# Allegro board ETHERZb.brd
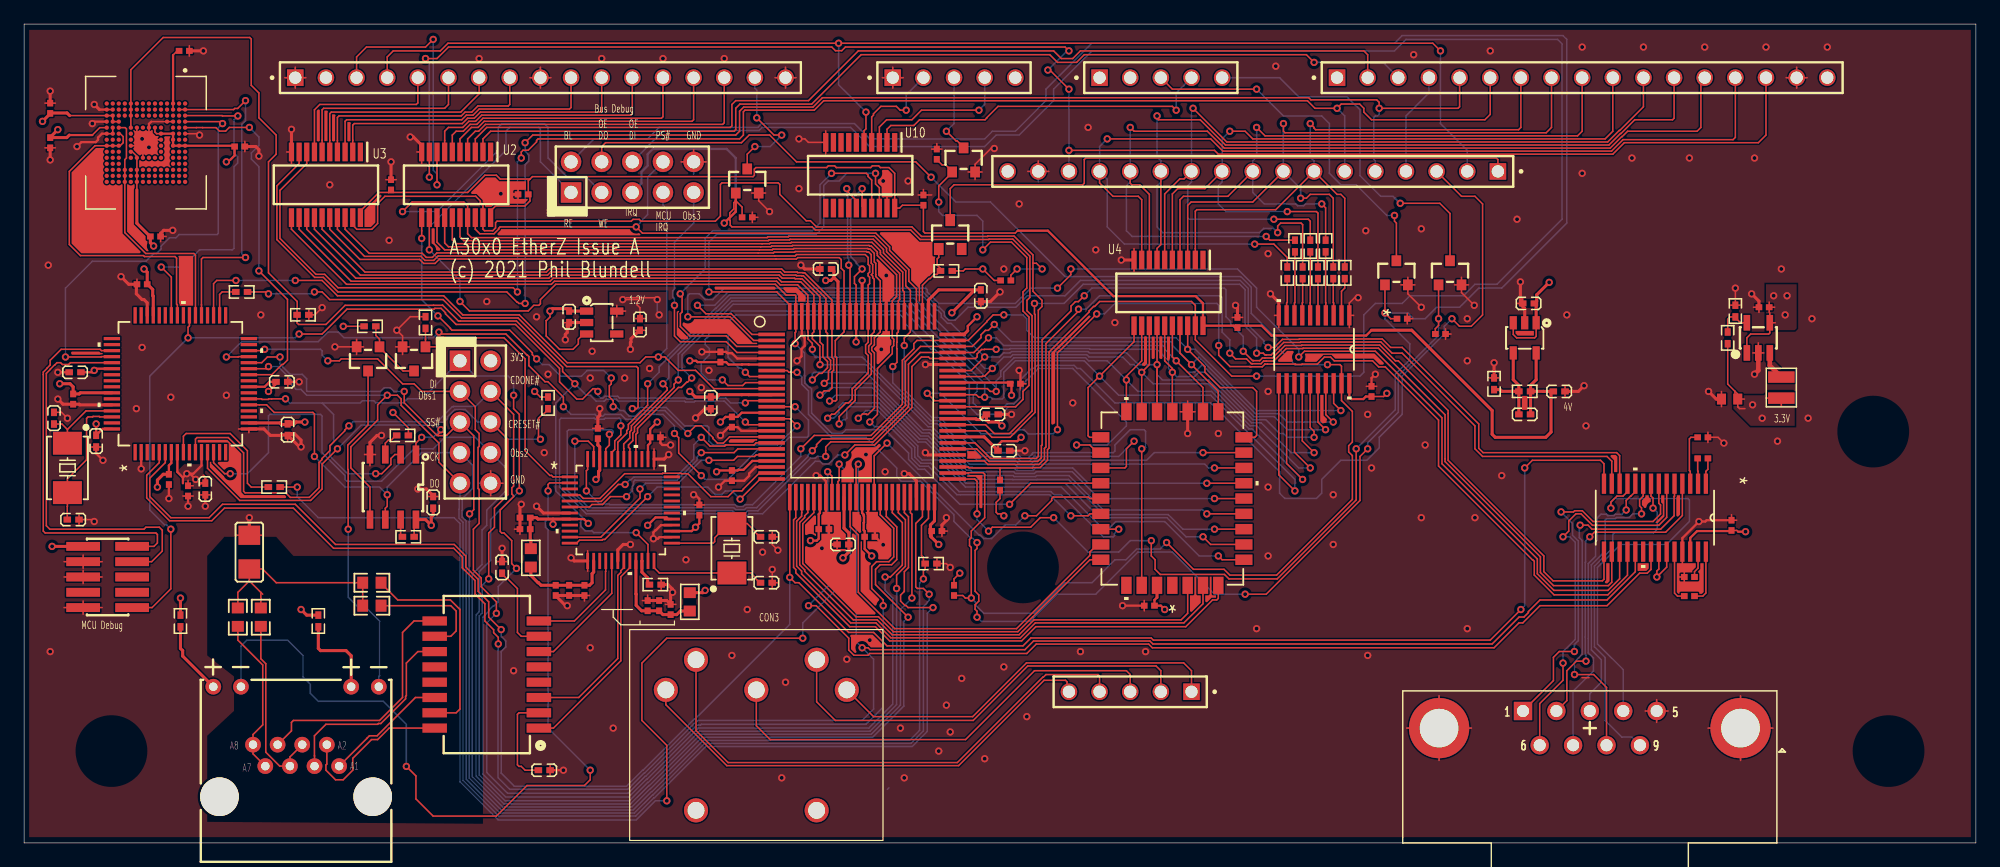
[diagram p0: board, top side]
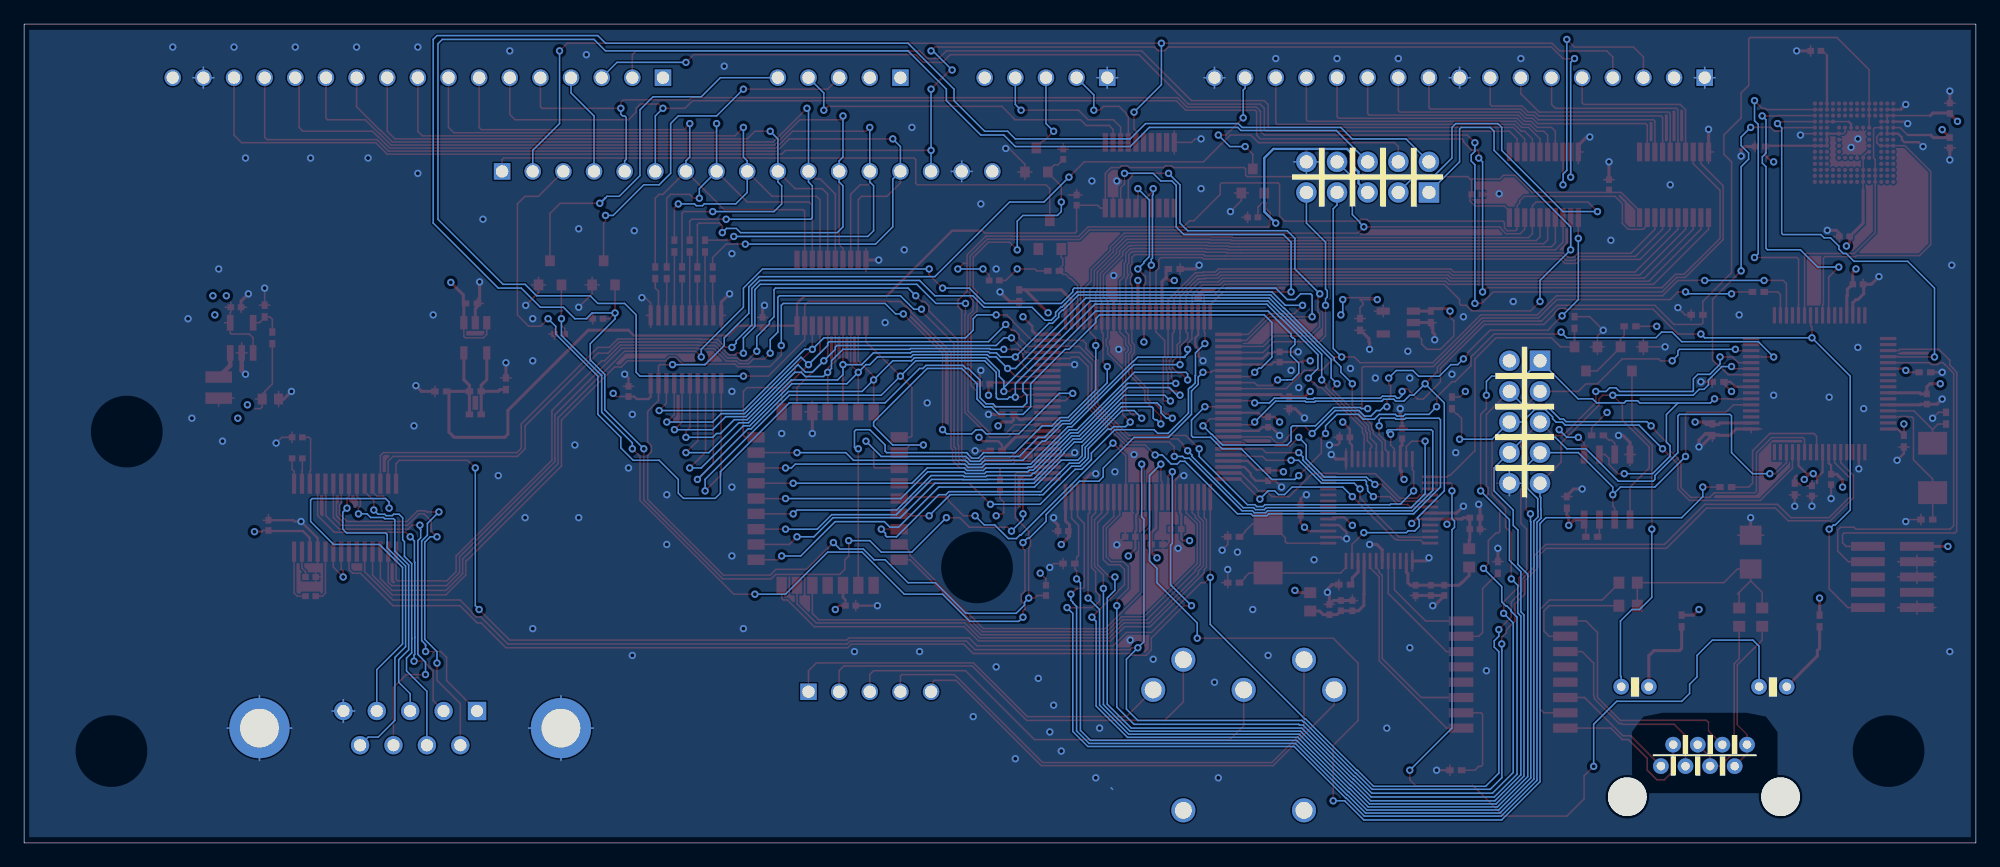
[diagram p1: board, bottom side, seen from below]

Outline 161.8 x 67.94 mm; copper layers: TOP, GROUND, POWER, BOTTOM. Coordinates in mm from the lower left corner of the outline.
Outline path: 0,67.94 0,0 161.8,0 161.8,67.94 0,67.94

## Design rules (mm)
constraint set DEFAULT: min track width 0.127

## Placement (name value [footprint] x y rotation side)
C3  100nF  [C-0402-H0_5]  66.45 47.62 180 top
C17  10nF  [C-0402-H0_5]  39.62 22.86 90 top
C18  10nF  [C-0402-H0_5]  43.12 6.03 0 top
C19  1nF  [C-1206-H1_6]  18.67 24.13 90 top
C20  22pF  [C-0402-H0_5]  61.53 25.4 0 top
C21  22pF  [C-0402-H0_5]  61.53 21.59 0 top
C43  4.7uF  [CAPC1005_IS0402Q]  144.24 44.45 180 top
C44  22uF  [CAPC1608_IS0603Q]  141.38 36.83 180 top
C45  100nF  [CAPC1005_IS0402Q]  58.67 30.48 270 top
C46  100nF  [CAPC1005_IS0402Q]  58.67 34.92 270 top
C47  100nF  [CAPC1005_IS0402Q]  57.72 40.32 90 top
C48  100nF  [CAPC1005_IS0402Q]  66.29 26.04 0 top
C49  100nF  [CAPC1005_IS0402Q]  70.1 25.4 0 top
C50  100nF  [CAPC1005_IS0402Q]  75.66 25.88 0 top
C51  100nF  [CAPC1005_IS0402Q]  47.56 33.97 90 top
C52  100nF  [CAPC1005_IS0402Q]  4.06 36.83 270 top
C53  100nF  [CAPC1005_IS0402Q]  93.28 19.68 180 top
C55  4.7uF  [CAPC1005_IS0402Q]  52.64 19.68 90 top
C57  100nF  [CAPC1005_IS0402Q]  51.69 19.68 90 top
C58  10nF  [CAPC1005_IS0402Q]  53.59 19.37 90 top
C59  4.7uF  [CAPC1005_IS0402Q]  41.53 26.04 180 top
C60  100nF  [CAPC1005_IS0402Q]  41.53 26.99 180 top
C61  4.7uF  [CAPC1005_IS0402Q]  45.18 20.95 270 top
C62  100nF  [CAPC1005_IS0402Q]  44.07 20.95 270 top
C63  10nF  [CAPC1005_IS0402Q]  46.45 20.95 270 top
C64  100nF  [CAPC1005_IS0402Q]  13.27 65.72 0 top
C65  100nF  [CAPC1005_IS0402Q]  17.88 57.78 0 top
C66  100nF  [CAPC1005_IS0402Q]  2.16 58.1 270 top
C67  100nF  [CAPC1005_IS0402Q]  2.16 60.96 90 top
C68  100nF  [CAPC1005_IS0402Q]  10.89 50.32 0 top
C69  100nF  [CAPC1005_IS0402Q]  9.78 46.35 180 top
C71  4.7uF  [CAPC1005_IS0402Q]  12 30.16 270 top
C72  2.2uF  [CAPC1005_IS0402Q]  13.59 29.21 270 top
C79  1uF  [C-0402-H0_5]  51.05 43.02 270 top
C80  1uF  [C-0402-H0_5]  45.18 43.66 270 top
C81  1uF  [C-0402-H0_5]  124.71 44.77 180 top
C82  180pF  [C-0402-H0_5]  124.4 35.56 180 top
C83  1uF  [C-0402-H0_5]  127.25 37.47 0 top
C84  100nF  [C-0402-H0_5]  56.93 36.51 270 top
C85  100nF  [C-0402-H0_5]  79.31 45.4 270 top
C86  100nF  [C-0402-H0_5]  67.88 24.77 180 top
C87  100nF  [C-0402-H0_5]  80.26 35.56 0 top
C88  100nF  [CAPC1005_IS0402Q]  139.16 31.91 180 top
C89  100nF  [CAPC1005_IS0402Q]  139.16 33.66 0 top
C90  100nF  [CAPC1005_IS0402Q]  138.05 20.48 180 top
C91  100nF  [CAPC1005_IS0402Q]  138.05 22.07 180 top
C92  100nF  [CAPC1005_IS0402Q]  141.54 26.35 90 top
C93  22pF  [C-0402-H0_5]  4.06 26.83 0 top
C94  22pF  [C-0402-H0_5]  2.48 35.24 90 top
C95  100nF  [C-0402-H0_5]  15.02 29.37 270 top
C96  100nF  [C-0402-H0_5]  21.37 38.26 0 top
C97  100nF  [C-0402-H0_5]  5.97 33.34 270 top
C98  100nF  [C-0402-H0_5]  4.22 39.05 180 top
C99  100nF  [CAPC1005_IS0402Q]  52.32 33.66 0 top
C100  100nF  [CAPC1005_IS0402Q]  82.17 38.1 0 top
C101  100nF  [CAPC1005_IS0402Q]  55.98 27.62 90 top
C102  100nF  [C-0402-H0_5]  81.22 32.54 0 top
C103  100nF  [C-0402-H0_5]  33.91 28.26 90 top
C104  100nF  [C-0402-H0_5]  21.84 34.29 270 top
C105  100nF  [CAPC1005_IS0402Q]  111.7 37.47 90 top
C106  100nF  [CAPC1005_IS0402Q]  100.58 43.18 90 top
C107  100nF  [CAPC1005_IS0402Q]  74.55 53.34 90 top
C108  100nF  [CAPC1005_IS0402Q]  41.37 53.82 180 top
C109  100nF  [CAPC1005_IS0402Q]  30.42 54.61 90 top
CON2  RJR31-1F08-PK10-TS  [JACK-RJ45-1X1-DIP12-H12_85-A]  22.54 3.83 0 top
CON3  -  [DIN5]  60.7 15.2 180 top
D1  BAS21  [D-SOT23-H1_1]  76.77 50.48 0 top
FB1  600Z  [L-0603-H0_8]  55.18 20 270 top
FB2  600Z  [L-0603-H0_8]  42.01 23.65 270 top
J1  20021121-00010C4LF  [HEADER-SMD-2X5-P1_27-H6_12]  6.92 22.07 270 top
J2  2213S-10G-BK-1143-F2  [HEADER-2X5-P2_54-H8_5]  37.4 34.92 270 top
J3  2213S-10G-BK-1143-F2  [HEADER-2X5-P2_54-H8_5]  50.42 55.24 0 top
L2  2.2uH  [L-2_5X2_0-H1_2]  145.67 37.78 270 top
NOREF  -  [unnamed]  82.8 22.86 0 top
NOREF#2  -  [unnamed]  154.56 7.62 0 top
NOREF#3  -  [unnamed]  153.29 34.13 0 top
NOREF#4  -  [unnamed]  7.24 7.62 0 top
P1  TSW-117-05-G-S  [SAMTEC_TSW-117-05-G-S]  108.84 63.5 0 top
P2  TSW-117-05-G-S  [SAMTEC_TSW-117-05-G-S]  22.48 63.5 0 top
P3  HDR_1X5_M  [SAMTEC_TSW-105-13-L-S]  89.15 63.5 0 top
P4  HDR_1X5_M  [SAMTEC_TSW-105-13-L-S]  72.01 63.5 0 top
P5  TSW-117-05-G-S  [SAMTEC_TSW-117-05-G-S]  122.17 55.72 180 top
P6  HDR5  [SAMTEC_TSW-105-13-L-S]  96.77 12.54 180 top
P7  DB9  [CONN-DIP9-DSUB-P2_77-H12_8]  129.79 9.53 0 top
Q5  NX7002AK  [Q-SOT23-H1_1]  32.32 40.16 180 top
Q6  NX7002AK  [Q-SOT23-H1_1]  28.51 40.16 180 top
Q8  NX7002AK  [Q-SOT23-H1_1]  59.94 54.93 0 top
Q9  NX7002AK  [Q-SOT23-H1_1]  77.88 56.67 0 top
Q10  NX7002AK  [Q-SOT23-H1_1]  118.21 47.31 0 top
Q11  NX7002AK  [Q-SOT23-H1_1]  113.76 47.31 0 top
R6  75R  [R-0603-H0_45]  28.83 19.68 180 top
R8  75R  [R-0603-H0_45]  28.83 21.59 180 top
R9  75R  [R-0603-H0_45]  19.62 18.73 90 top
R10  75R  [R-0603-H0_45]  17.72 18.73 90 top
R11  240R  [R-0402-H0_35]  24.39 18.41 270 top
R12  240R  [R-0402-H0_35]  12.96 18.41 270 top
R13  56R  [R-0402-H0_35]  109.48 47.31 270 top
R14  56R  [R-0402-H0_35]  108.53 47.31 270 top
R15  56R  [R-0402-H0_35]  107.89 49.53 270 top
R16  56R  [R-0402-H0_35]  107.26 47.31 270 top
R17  56R  [R-0402-H0_35]  106.62 49.53 270 top
R18  56R  [R-0402-H0_35]  105.99 47.31 270 top
R19  56R  [R-0402-H0_35]  105.35 49.53 270 top
R20  56R  [R-0402-H0_35]  104.72 47.31 270 top
R42  68K  [R-0402-H0_35]  141.22 41.91 90 top
R43  15K  [R-0402-H0_35]  141.86 44.13 90 top
R44  10K  [R-0402-H0_35]  76.45 47.47 180 top
R45  4.7K  [R-0402-H0_35]  33.27 43.18 90 top
R46  4.7K  [R-0402-H0_35]  28.67 42.87 0 top
R47  3.01K  [R-0402-H0_35]  52.32 21.43 0 top
R48  10K  [R-0402-H0_35]  23.11 43.82 0 top
R49  10K  [R-0402-H0_35]  75.18 23.18 0 top
R50  120K  [R-0402-H0_35]  124.4 37.47 180 top
R51  30.1K  [R-0402-H0_35]  121.86 38.1 90 top
R52  56R  [R-0402-H0_35]  20.73 29.53 0 top
R53  56R  [R-0402-H0_35]  18.03 45.72 0 top
R54  10K  [R-0402-H0_35]  31.37 33.81 0 top
R55  10K  [R-0402-H0_35]  31.85 25.4 180 top
R56  10K  [R-0402-H0_35]  43.43 36.51 270 top
R57  10K  [RESC1005_IS0402Q]  59.94 51.91 0 top
R58  10K  [RESC1005_IS0402Q]  75.66 57.15 90 top
R59  10K  [RESC1005_IS0402Q]  114.24 43.5 0 top
R60  10K  [RESC1005_IS0402Q]  117.41 42.23 0 top
R61  10K  [RESC1005_IS0402Q]  81.38 46.67 0 top
R62  10K  [RESC1005_IS0402Q]  80.9 29.69 90 top
R63  10K  [RESC1005_IS0402Q]  77.09 20.95 270 top
T1  Pulse  H1102NL  [TRANS-SMD16-P1_27-H6_3]  38.35 13.97 90 top
U1  KSZ8851-16MLL  [LQFP48_7X7_MCH]  49.47 27.62 0 top
U2  QS3245  [SOP64P602X173-20N]  35.81 54.61 270 top
U3  QS3245  [SOP64P602X173-20N]  25.02 54.61 270 top
U4  QS3245  [SOP64P602X173-20N]  94.87 45.64 270 top
U5  SN74ACT245  [PW20]  106.93 40.96 270 top
U6  THGBMNG5D1LBAIT  [BGA153N50P14X14_1000X1100X8]  10.1 58.1 270 top
U7  ATSAM4S2BA-AU  [QFP64-10X10MC_MCH]  12.95 38.1 90 top
U8  TLV62569DBV  [IC-SOT23-5-P0_95-H1_45-A]  143.76 41.91 0 top
U9  iCE40HX1K-VQ100  [VQ100_FP]  69.47 36.2 0 top
U10  QS3245  [SOP64P602X173-20N]  69.31 55.4 270 top
U11  SST39VF010-70-4I-NHE-T  [PLCC32_NH_SST_MCH]  95.19 28.57 180 top
U12  IS25LQ020B-JNLE  [IC-SOIC8-4X5-P1_27-H1_75]  30.58 29.53 180 top
U13  AP2127R-1.0TRG1  [IC-SOT23-5-P0_95-H1_45]  47.88 43.18 270 top
U14  AP2127K-ADJTRG1  [IC-SOT23-5-P0_95-H1_45]  124.4 41.91 180 top
U15  MAX3243E_PW_28  [PW28]  135.19 26.99 270 top
Y2  25MHz  [XTAL-SMD2-5_2X3_4-H1_3]  58.67 24.45 90 top
Y3  25MHz  [XTAL-SMD2-5_2X3_4-H1_3]  3.59 31.11 270 top

## Library data of the parts
C3 C17-C21 C79-C87 C93-C98 C102-C104 = CAP
C43 C55 C59 C61 C71 = CAP: User Part Number: 16-00295
C44 = CAP: User Part Number: 16-00334
C45-C53 C57 C60 C62 C64-C69 C88-C92 C99-C101 C105-C109 = CAP: User Part Number: 16-00326
C58 C63 = CAP: User Part Number: 16-00329
C72 = CAP: User Part Number: 16-00333
CON2 = RJ45_NOSHIELD
CON3 = DIN5_0
D1 = DIODE_SOT-23
FB1 FB2 = FB
J1-J3 = HDR2x5-005
L2 = IND-SHIELDED_0
P1 = TSW-117-05-G-S_1
P2 = TSW-117-05-G-S_3
P3 = HDR_1X5_M_5
P4 = HDR_1X5_M_6
P5 = TSW-117-05-G-S_4
P6 = HDR_1X5_M_3
P7 = CONNECTOR DB9 GND_1
Q5 Q6 Q8-Q11 = NMOS_SOT23
R6 R8-R20 R42-R56 = RES
R57-R63 = RES: User Part Number: 15-00513
T1 = RJ45-T_0
U1 = KSZ8851-16MLL: User Part Number: PN; Tolerance: TOL
U2-U4 U10 = SN74ACT245_0
U5 = SN74ACT245: User Part Number: 13-00249; Tolerance: TOL
U6 = THGBMNG5D1LBAIT
U7 = ATSAM4S2BA-AU: User Part Number: PN; Tolerance: TOL
U8 = TLV62569
U9 = iCE40HX1K-VQ100
U11 = SST39VF010-70-4I-NHE-T: User Part Number: PN; Tolerance: TOL
U12 = IS25LQ020B
U13 = TPS71710-SO5_5
U14 = TPS71710-SO5_0
U15 = MAX3243ECPW: User Part Number: PN; Tolerance: TOL
Y2 Y3 = XTAL

## Footprints (pads in the part's own frame, mm; a bottom-side part is the same pattern mirrored in y, then rotated)
BGA153N50P14X14_1000X1100X8
  custom 0.35x0.35 smd: A1(-3.25,3.25) A2(-2.75,3.25) A3(-2.25,3.25) A4(-1.75,3.25) A5(-1.25,3.25) A6(-0.75,3.25) A7(-0.25,3.25) A8(0.25,3.25) A9(0.75,3.25) A10(1.25,3.25) A11(1.75,3.25) A12(2.25,3.25) A13(2.75,3.25) A14(3.25,3.25) B1(-3.25,2.75) B2(-2.75,2.75) B3(-2.25,2.75) B4(-1.75,2.75) B5(-1.25,2.75) B6(-0.75,2.75) B7(-0.25,2.75) B8(0.25,2.75) B9(0.75,2.75) B10(1.25,2.75) B11(1.75,2.75) B12(2.25,2.75) B13(2.75,2.75) B14(3.25,2.75) C1(-3.25,2.25) C2(-2.75,2.25) C3(-2.25,2.25) C4(-1.75,2.25) C5(-1.25,2.25) C6(-0.75,2.25) C7(-0.25,2.25) C8(0.25,2.25) C9(0.75,2.25) C10(1.25,2.25) C11(1.75,2.25) C12(2.25,2.25) C13(2.75,2.25) C14(3.25,2.25) D1(-3.25,1.75) D2(-2.75,1.75) D3(-2.25,1.75) D4(-1.75,1.75) D12(2.25,1.75) D13(2.75,1.75) D14(3.25,1.75) E1(-3.25,1.25) E2(-2.75,1.25) E3(-2.25,1.25) E5(-1.25,1.25) E6(-0.75,1.25) E7(-0.25,1.25) E8(0.25,1.25) E9(0.75,1.25) E10(1.25,1.25) E12(2.25,1.25) E13(2.75,1.25) E14(3.25,1.25) F1(-3.25,0.75) F2(-2.75,0.75) F3(-2.25,0.75) F5(-1.25,0.75) F10(1.25,0.75) F12(2.25,0.75) F13(2.75,0.75) F14(3.25,0.75) G1(-3.25,0.25) G2(-2.75,0.25) G3(-2.25,0.25) G5(-1.25,0.25) G10(1.25,0.25) G12(2.25,0.25) G13(2.75,0.25) G14(3.25,0.25) H1(-3.25,-0.25) H2(-2.75,-0.25) H3(-2.25,-0.25) H5(-1.25,-0.25) H10(1.25,-0.25) H12(2.25,-0.25) H13(2.75,-0.25) H14(3.25,-0.25) J1(-3.25,-0.75) J2(-2.75,-0.75) J3(-2.25,-0.75) J5(-1.25,-0.75) J10(1.25,-0.75) J12(2.25,-0.75) J13(2.75,-0.75) J14(3.25,-0.75) K1(-3.25,-1.25) K2(-2.75,-1.25) K3(-2.25,-1.25) K5(-1.25,-1.25) K6(-0.75,-1.25) K7(-0.25,-1.25) K8(0.25,-1.25) K9(0.75,-1.25) K10(1.25,-1.25) K12(2.25,-1.25) K13(2.75,-1.25) K14(3.25,-1.25) L1(-3.25,-1.75) L2(-2.75,-1.75) L3(-2.25,-1.75) L12(2.25,-1.75) L13(2.75,-1.75) L14(3.25,-1.75) M1(-3.25,-2.25) M2(-2.75,-2.25) M3(-2.25,-2.25) M4(-1.75,-2.25) M5(-1.25,-2.25) M6(-0.75,-2.25) M7(-0.25,-2.25) M8(0.25,-2.25) M9(0.75,-2.25) M10(1.25,-2.25) M11(1.75,-2.25) M12(2.25,-2.25) M13(2.75,-2.25) M14(3.25,-2.25) N1(-3.25,-2.75) N2(-2.75,-2.75) N3(-2.25,-2.75) N4(-1.75,-2.75) N5(-1.25,-2.75) N6(-0.75,-2.75) N7(-0.25,-2.75) N8(0.25,-2.75) N9(0.75,-2.75) N10(1.25,-2.75) N11(1.75,-2.75) N12(2.25,-2.75) N13(2.75,-2.75) N14(3.25,-2.75) P1(-3.25,-3.25) P2(-2.75,-3.25) P3(-2.25,-3.25) P4(-1.75,-3.25) P5(-1.25,-3.25) P6(-0.75,-3.25) P7(-0.25,-3.25) P8(0.25,-3.25) P9(0.75,-3.25) P10(1.25,-3.25) P11(1.75,-3.25) P12(2.25,-3.25) P13(2.75,-3.25) P14(3.25,-3.25)
C-0402-H0_5
  rect 0.625x0.5 smd: 1(-0.487,0) 2(0.487,0)
C-1206-H1_6
  rect 1.6x1.8 smd: 1(-1.4,0) 2(1.4,0)
CAPC1005_IS0402Q
  rect 0.55x0.5 smd: 1(-0.425,0) 2(0.425,0)
CAPC1608_IS0603Q
  rect 0.75x0.9 smd: 1(-0.675,0) 2(0.675,0)
CONN-DIP9-DSUB-P2_77-H12_8
  rect 1.524x1.524 hole 1: 1(-5.54,1.42)
  round 1.524 hole 1: 2(-2.77,1.42) 3(0,1.42) 4(2.77,1.42) 5(5.54,1.42) 6(-4.155,-1.42) 7(-1.385,-1.42) 8(1.385,-1.42) 9(4.155,-1.42)
  round 5 hole 3.2: 10(-12.495,0) 11(12.495,0)
D-SOT23-H1_1
  rect 0.8x1 smd: 1(-0.95,-1.2) 2(0.95,-1.2) 3(0,1.2)
DIN5
  round 2 hole 1.4: 1(-7.5,2.5) 2(0,2.5) 3(7.5,2.5) 4(-5,0) 5(5,0) 6(5,12.5) 7(-5,12.5)
HEADER-2X5-P2_54-H8_5
  rect 1.7x1.7 hole 1.1: 1(-5.08,-1.27)
  round 1.7 hole 1.1: 2(-5.08,1.27) 3(-2.54,-1.27) 4(-2.54,1.27) 5(0,-1.27) 6(0,1.27) 7(2.54,-1.27) 8(2.54,1.27) 9(5.08,-1.27) 10(5.08,1.27)
HEADER-SMD-2X5-P1_27-H6_12
  rect 0.74x2.8 smd: 1(-2.54,-2.03) 2(-2.54,2.03) 3(-1.27,-2.03) 4(-1.27,2.03) 5(0,-2.03) 6(0,2.03) 7(1.27,-2.03) 8(1.27,2.03) 9(2.54,-2.03) 10(2.54,2.03)
IC-SOIC8-4X5-P1_27-H1_75
  rect 0.55x1.5 smd: 1(-1.905,-2.7) 2(-0.635,-2.7) 3(0.635,-2.7) 4(1.905,-2.7) 5(1.905,2.7) 6(0.635,2.7) 7(-0.635,2.7) 8(-1.905,2.7)
IC-SOT23-5-P0_95-H1_45
  rect 0.6x1.1 smd: 1(-0.95,-1.25) 2(0,-1.25) 3(0.95,-1.25) 4(0.95,1.25) 5(-0.95,1.25)
IC-SOT23-5-P0_95-H1_45-A
  rect 0.55x1.3 smd: 1(-0.95,-1.25) 2(0,-1.25) 3(0.95,-1.25) 4(0.95,1.25) 5(-0.95,1.25)
JACK-RJ45-1X1-DIP12-H12_85-A
  round 3.2 hole 3.2 unplated: (-6.35,0) (6.35,0)
  round 1.3 hole 0.7: A1(3.57,2.54) A2(2.55,4.32) A3(1.53,2.54) A4(0.51,4.32) A5(-0.51,2.54) A6(-1.53,4.32) A7(-2.55,2.54) A8(-3.57,4.32) A9(6.86,9.13) A10(4.57,9.13) A11(-4.57,9.13) A12(-6.86,9.13)
L-2_5X2_0-H1_2
  rect 0.95x2.2 smd: 1(-0.875,0) 2(0.875,0)
L-0603-H0_8
  rect 0.9x1 smd: 1(-0.762,0) 2(0.762,0)
LQFP48_7X7_MCH
  rect 1.341x0.229 smd: 1(-4.226,2.75) 2(-4.226,2.25) 3(-4.226,1.75) 4(-4.226,1.25) 5(-4.226,0.75) 6(-4.226,0.25) 7(-4.226,-0.25) 8(-4.226,-0.75) 9(-4.226,-1.25) 10(-4.226,-1.75) 11(-4.226,-2.25) 12(-4.226,-2.75) 25(4.226,-2.75) 26(4.226,-2.25) 27(4.226,-1.75) 28(4.226,-1.25) 29(4.226,-0.75) 30(4.226,-0.25) 31(4.226,0.25) 32(4.226,0.75) 33(4.226,1.25) 34(4.226,1.75) 35(4.226,2.25) 36(4.226,2.75)
  rect 0.229x1.341 smd: 13(-2.75,-4.226) 14(-2.25,-4.226) 15(-1.75,-4.226) 16(-1.25,-4.226) 17(-0.75,-4.226) 18(-0.25,-4.226) 19(0.25,-4.226) 20(0.75,-4.226) 21(1.25,-4.226) 22(1.75,-4.226) 23(2.25,-4.226) 24(2.75,-4.226) 37(2.75,4.226) 38(2.25,4.226) 39(1.75,4.226) 40(1.25,4.226) 41(0.75,4.226) 42(0.25,4.226) 43(-0.25,4.226) 44(-0.75,4.226) 45(-1.25,4.226) 46(-1.75,4.226) 47(-2.25,4.226) 48(-2.75,4.226)
PLCC32_NH_SST_MCH
  rect 0.864x1.422 smd: 1(0,7.201) 2(-1.27,7.201) 3(-2.54,7.201) 4(-3.81,7.201) 14(-3.81,-7.201) 15(-2.54,-7.201) 16(-1.27,-7.201) 17(0,-7.201) 18(1.27,-7.201) 19(2.54,-7.201) 20(3.81,-7.201) 30(3.81,7.201) 31(2.54,7.201) 32(1.27,7.201)
  rect 1.422x0.864 smd: 5(-5.931,5.08) 6(-5.931,3.81) 7(-5.931,2.54) 8(-5.931,1.27) 9(-5.931,0) 10(-5.931,-1.27) 11(-5.931,-2.54) 12(-5.931,-3.81) 13(-5.931,-5.08) 21(5.931,-5.08) 22(5.931,-3.81) 23(5.931,-2.54) 24(5.931,-1.27) 25(5.931,0) 26(5.931,1.27) 27(5.931,2.54) 28(5.931,3.81) 29(5.931,5.08)
PW20
  rect 1.676x0.356 smd: 1(-2.819,2.925) 2(-2.819,2.275) 3(-2.819,1.625) 4(-2.819,0.975) 5(-2.819,0.325) 6(-2.819,-0.325) 7(-2.819,-0.975) 8(-2.819,-1.625) 9(-2.819,-2.275) 10(-2.819,-2.925) 11(2.819,-2.925) 12(2.819,-2.275) 13(2.819,-1.625) 14(2.819,-0.975) 15(2.819,-0.325) 16(2.819,0.325) 17(2.819,0.975) 18(2.819,1.625) 19(2.819,2.275) 20(2.819,2.925)
PW28
  rect 1.676x0.356 smd: 1(-2.819,4.225) 2(-2.819,3.575) 3(-2.819,2.925) 4(-2.819,2.275) 5(-2.819,1.625) 6(-2.819,0.975) 7(-2.819,0.325) 8(-2.819,-0.325) 9(-2.819,-0.975) 10(-2.819,-1.625) 11(-2.819,-2.275) 12(-2.819,-2.925) 13(-2.819,-3.575) 14(-2.819,-4.225) 15(2.819,-4.225) 16(2.819,-3.575) 17(2.819,-2.925) 18(2.819,-2.275) 19(2.819,-1.625) 20(2.819,-0.975) 21(2.819,-0.325) 22(2.819,0.325) 23(2.819,0.975) 24(2.819,1.625) 25(2.819,2.275) 26(2.819,2.925) 27(2.819,3.575) 28(2.819,4.225)
Q-SOT23-H1_1
  rect 0.8x0.9 smd: 1(-0.95,-1) 2(0.95,-1) 3(0,1)
QFP64-10X10MC_MCH
  rect 1.356x0.27 smd: 1(-5.678,3.75) 2(-5.678,3.25) 3(-5.678,2.75) 4(-5.678,2.25) 5(-5.678,1.75) 6(-5.678,1.25) 7(-5.678,0.75) 8(-5.678,0.25) 9(-5.678,-0.25) 10(-5.678,-0.75) 11(-5.678,-1.25) 12(-5.678,-1.75) 13(-5.678,-2.25) 14(-5.678,-2.75) 15(-5.678,-3.25) 16(-5.678,-3.75) 33(5.678,-3.75) 34(5.678,-3.25) 35(5.678,-2.75) 36(5.678,-2.25) 37(5.678,-1.75) 38(5.678,-1.25) 39(5.678,-0.75) 40(5.678,-0.25) 41(5.678,0.25) 42(5.678,0.75) 43(5.678,1.25) 44(5.678,1.75) 45(5.678,2.25) 46(5.678,2.75) 47(5.678,3.25) 48(5.678,3.75)
  rect 0.27x1.356 smd: 17(-3.75,-5.678) 18(-3.25,-5.678) 19(-2.75,-5.678) 20(-2.25,-5.678) 21(-1.75,-5.678) 22(-1.25,-5.678) 23(-0.75,-5.678) 24(-0.25,-5.678) 25(0.25,-5.678) 26(0.75,-5.678) 27(1.25,-5.678) 28(1.75,-5.678) 29(2.25,-5.678) 30(2.75,-5.678) 31(3.25,-5.678) 32(3.75,-5.678) 49(3.75,5.678) 50(3.25,5.678) 51(2.75,5.678) 52(2.25,5.678) 53(1.75,5.678) 54(1.25,5.678) 55(0.75,5.678) 56(0.25,5.678) 57(-0.25,5.678) 58(-0.75,5.678) 59(-1.25,5.678) 60(-1.75,5.678) 61(-2.25,5.678) 62(-2.75,5.678) 63(-3.25,5.678) 64(-3.75,5.678)
R-0402-H0_35
  rect 0.625x0.5 smd: 1(-0.487,0) 2(0.487,0)
R-0603-H0_45
  rect 0.9x1 smd: 1(-0.762,0) 2(0.762,0)
RESC1005_IS0402Q
  rect 0.55x0.5 smd: 1(-0.425,0) 2(0.425,0)
SAMTEC_TSW-105-13-L-S
  rect 1.37x1.37 hole 1.02: 1(0,0)
  round 1.37 hole 1.02: 2(2.54,0) 3(5.08,0) 4(7.62,0) 5(10.16,0)
SAMTEC_TSW-117-05-G-S
  rect 1.37x1.37 hole 1.02: 01(0,0)
  round 1.37 hole 1.02: 02(2.54,0) 03(5.08,0) 04(7.62,0) 05(10.16,0) 06(12.7,0) 07(15.24,0) 08(17.78,0) 09(20.32,0) 10(22.86,0) 11(25.4,0) 12(27.94,0) 13(30.48,0) 14(33.02,0) 15(35.56,0) 16(38.1,0) 17(40.64,0)
SOP64P602X173-20N
  rect 1.55x0.435 smd: 1(-2.725,2.858) 2(-2.725,2.222) 3(-2.725,1.588) 4(-2.725,0.952) 5(-2.725,0.318) 6(-2.725,-0.318) 7(-2.725,-0.952) 8(-2.725,-1.588) 9(-2.725,-2.222) 10(-2.725,-2.858) 11(2.725,-2.858) 12(2.725,-2.222) 13(2.725,-1.588) 14(2.725,-0.952) 15(2.725,-0.318) 16(2.725,0.318) 17(2.725,0.952) 18(2.725,1.588) 19(2.725,2.222) 20(2.725,2.858)
TRANS-SMD16-P1_27-H6_3
  rect 0.76x2.03 smd: 1(-4.445,-4.32) 2(-3.175,-4.32) 3(-1.905,-4.32) 4(-0.635,-4.32) 5(0.635,-4.32) 6(1.905,-4.32) 7(3.175,-4.32) 8(4.445,-4.32) 9(4.445,4.32) 10(3.175,4.32) 11(1.905,4.32) 12(0.635,4.32) 13(-0.635,4.32) 14(-1.905,4.32) 15(-3.175,4.32) 16(-4.445,4.32)
unnamed
  round 0 hole 2.997 unplated: (0,0)
VQ100_FP
  rect 2.2x0.3 smd: 1(-7.5,6) 2(-7.5,5.5) 3(-7.5,5) 4(-7.5,4.5) 5(-7.5,4) 6(-7.5,3.5) 7(-7.5,3) 8(-7.5,2.5) 9(-7.5,2) 10(-7.5,1.5) 11(-7.5,1) 12(-7.5,0.5) 13(-7.5,0) 14(-7.5,-0.5) 15(-7.5,-1) 16(-7.5,-1.5) 17(-7.5,-2) 18(-7.5,-2.5) 19(-7.5,-3) 20(-7.5,-3.5) 21(-7.5,-4) 22(-7.5,-4.5) 23(-7.5,-5) 24(-7.5,-5.5) 25(-7.5,-6) 51(7.5,-6) 52(7.5,-5.5) 53(7.5,-5) 54(7.5,-4.5) 55(7.5,-4) 56(7.5,-3.5) 57(7.5,-3) 58(7.5,-2.5) 59(7.5,-2) 60(7.5,-1.5) 61(7.5,-1) 62(7.5,-0.5) 63(7.5,0) 64(7.5,0.5) 65(7.5,1) 66(7.5,1.5) 67(7.5,2) 68(7.5,2.5) 69(7.5,3) 70(7.5,3.5) 71(7.5,4) 72(7.5,4.5) 73(7.5,5) 74(7.5,5.5) 75(7.5,6)
  rect 0.3x2.2 smd: 26(-6,-7.5) 27(-5.5,-7.5) 28(-5,-7.5) 29(-4.5,-7.5) 30(-4,-7.5) 31(-3.5,-7.5) 32(-3,-7.5) 33(-2.5,-7.5) 34(-2,-7.5) 35(-1.5,-7.5) 36(-1,-7.5) 37(-0.5,-7.5) 38(0,-7.5) 39(0.5,-7.5) 40(1,-7.5) 41(1.5,-7.5) 42(2,-7.5) 43(2.5,-7.5) 44(3,-7.5) 45(3.5,-7.5) 46(4,-7.5) 47(4.5,-7.5) 48(5,-7.5) 49(5.5,-7.5) 50(6,-7.5) 76(6,7.5) 77(5.5,7.5) 78(5,7.5) 79(4.5,7.5) 80(4,7.5) 81(3.5,7.5) 82(3,7.5) 83(2.5,7.5) 84(2,7.5) 85(1.5,7.5) 86(1,7.5) 87(0.5,7.5) 88(0,7.5) 89(-0.5,7.5) 90(-1,7.5) 91(-1.5,7.5) 92(-2,7.5) 93(-2.5,7.5) 94(-3,7.5) 95(-3.5,7.5) 96(-4,7.5) 97(-4.5,7.5) 98(-5,7.5) 99(-5.5,7.5) 100(-6,7.5)
XTAL-SMD2-5_2X3_4-H1_3
  rect 1.9x2.4 smd: 1(-2.05,0) 2(2.05,0)

## Nets
GND: C3.2 C17.2 C18.2 C19.2 C20.2 C21.2 C43.2 C44.2 C45.2 C46.2 C47.2 C48.2 C49.2 C50.2 C51.2 C52.2 C53.2 C55.2 C57.2 C58.2 C59.2 C60.2 C61.2 C62.2 C63.2 C64.2 C65.2 C66.2 C67.2 C68.2 C69.2 C71.2 C72.2 C79.2 C80.2 C81.2 C83.2 C84.2 C85.2 C86.2 C87.2 C89.2 C91.2 C92.2 C93.2 C94.2 C95.2 C96.2 C97.2 C98.2 C99.2 C100.2 C101.2 C102.2 C103.2 C104.2 C105.2 C106.2 C107.2 C108.2 C109.2 J1.3 J1.5 J1.9 J2.10 J3.10 P1.16 P2.01 P2.09 P2.17 P4.1 P5.16 P7.5 P7.10 P7.11 Q5.2(SOURCE) Q6.2(SOURCE) Q8.2(SOURCE) Q9.2(SOURCE) Q10.2(SOURCE) Q11.2(SOURCE) R43.2 R45.2 R47.2 R48.2 R49.2 R51.2 R57.2 R58.2 R59.2 R60.2 U1.7 U1.13 U1.18 U1.26 U1.28 U1.37 U2.10 U3.10 U4.10 U5.1 U5.10 U6.A6 U6.C4 U6.D4 U6.E7 U6.G5 U6.H10 U6.J5 U6.K8(VSS__5) U6.N2 U6.N5 U6.N6 U6.P2 U6.P4 U6.P6 U7.2 U7.17 U7.46 U7.60 U8.2 U9.5 U9.17 U9.23 U9.32 U9.39 U9.47 U9.55 U9.70 U9.84 U9.98 U10.10 U10.19 U11.16(VSS) U12.4 U13.2 U14.2 U15.25
VCC1V2: C79.1 C84.1 C85.1 C86.1 C87.1 U9.11 U9.35 U9.61 U9.77 U13.5(OUT)
VCC1V8_ETH: C59.1 C60.1 FB2.1 U1.8 U1.29
VCC3V3: C3.1 C44.1 C45.1 C46.1 C47.1 C48.1 C49.1 C50.1 C51.1 C52.1 C53.1 C65.1 C66.1 C67.1 C68.1 C69.1 C71.1 C80.1 C92.1 C99.1 C100.1 C101.1 C102.1 C103.1 C104.1 FB1.1 J1.1 J2.2 L2.2 R11.1 R12.1 R42.1 R44.1 R46.1 R54.2 R55.1 R56.1 R61.1 R62.1 R63.1 U1.27 U1.38 U1.46(VDD_IO_2) U6.A8 U6.B8 U6.C6 U6.C7 U6.C8 U6.E6 U6.F5 U6.J10 U6.J12 U6.J13 U6.J14 U6.K9 U6.M4 U6.N3 U6.N4 U6.P3 U6.P5 U7.7 U7.18 U7.45 U7.58 U9.6 U9.14 U9.22 U9.31 U9.38 U9.50 U9.58 U9.67 U9.75 U9.88 U9.92 U11.32 U12.8 U13.1 U13.3 U15.22 U15.23 U15.26(VCC)
VCC4_QS: C82.1 C83.1 C106.1 C107.1 C108.1 C109.1 R50.1 U2.20(VCC) U3.20(VCC) U4.20(VCC) U10.20(VCC) U14.5(OUT)
VCC5V: C43.1 C81.1 C105.1 P1.01 P1.17(VCC5V_2) P2.02(VCC5V) P4.5(VCC5V) P5.17 U5.20(VCC) U8.1 U8.4(VIN) U14.1 U14.3
VDD1V8A_ETH: C61.1 C62.1 C63.1 FB2.2 U1.14
VDD3V3A_ETH: C55.1 C57.1 C58.1 FB1.2 U1.21
VDDCORE_SAM: C72.1 C95.1 C96.1 C97.1 C98.1 U7.8 U7.12 U7.24 U7.54 U7.64(VDDPLL)
VDDI: C64.1 U6.C1 U6.C2
6: CON3.6
7: CON3.7
A2: U3.11 U9.97 U11.12
A3: U3.12 U9.96 U11.11
A4: U3.13 U9.95 U11.10
A5: U3.14 U9.94 U11.9
A6: U3.15 U9.93 U11.8
A7: U3.16 U9.91 U11.7
A8: U3.17 U9.87 U11.6
A9: U3.18 U9.86 U11.5
A10: U2.13 U9.85 U11.27
A11: U2.14 U9.83 U11.26
A12: U2.15 U9.82 U11.23
A13: U2.16 U9.81
ACT#: CON2.A9 Q6.3
ADVREF: U7.1
BD0: P1.07 P5.07 R13.1 U4.2
BD1: P1.08 P5.08 R14.1 U4.3
BD2: P1.09 P5.09 R15.1 U4.4
BD3: P1.10 P5.10 R16.1 U4.5
BD4: P1.11 P5.11 R17.1 U4.6
BD5: P1.12 P5.12 R18.1 U4.7
BD6: P1.13 P5.13 R19.1 U4.8
BD7: P1.14 P5.14 R20.1 U4.9
BL: J3.2 Q11.1 R59.1 U9.51
BL#: P3.3 Q11.3
CLK2: P1.04 P5.04
CTS: P7.8 U15.5
D0: U1.48 U4.18 U5.18 U9.74 U11.13
D1: U1.47 U4.17 U5.17 U9.73 U11.14
D2: U1.45 U4.16 U5.16 U9.72 U11.15
D3: U1.44 U4.15 U5.15 U9.71 U11.17
D4: U1.43 U4.14 U5.14 U9.69 U11.18
D5: U1.42 U4.13 U5.13 U9.68 U11.19
D6: U1.41 U4.12 U5.12 U9.66 U11.20
D7: U1.40 U4.11 U5.11 U9.65 U11.21
DCD: P7.1 U15.7
DSR: P7.6 U15.6
DTR: P7.4 U15.11
ECONET_FIQ#: D1.3(C) P5.01
ECONET_FIQ_3V3#: D1.1 R44.2 U9.78
ECONET_SEL#: P5.03 U9.9
ETH_CMD: U1.11 U9.21
ETH_CS#: U1.12 U9.25
ETH_IRQ#: U1.4 U9.24
ETH_RE#: U1.5 U9.19
ETH_WE#: U1.6 U9.20
FIQ: Q9.1 R58.1 U9.63
FLASH_A13: U9.40 U11.25
FLASH_A14: U9.27 U11.4
FLASH_A15: U9.36 U11.28
FLASH_A16: U9.30 U11.29
FLASH_A17: U9.28 U11.3
FLASH_A18: U9.29 U11.2
FLASH_CE#: U9.8 U11.22
FPGA_CDONE#: J2.4 U7.11 U9.43
FPGA_CLK: R53.2 U9.15
FPGA_CLK2: R52.2 U9.34
FPGA_CRESET#: J2.6 R56.2 U7.13 U9.44
FPGA_DEBUG3: J3.9 U9.4
FPGA_SCK: J2.7 U7.21 U9.48 U12.6
FPGA_SDI: J2.1 U7.22 U9.46 U12.2
FPGA_SDO: J2.9 U7.27 U9.45 U12.5
FPGA_SS1#: J2.3 U7.30 U9.41
FPGA_SS2#: U7.29 U9.13
FPGA_SS3#: J2.8 U7.14 U9.42
FPGA_SS#: J2.5 R49.1 U7.28 U9.49 U12.1
IO_RESET#: R48.1 U1.23 U6.K1 U6.K2 U6.K3 U6.K5 U9.16
IOC_SEL#: J3.8 U2.18 U9.79
IOGT: Q10.1 R60.1 U9.7
IOGT#: P3.5 Q10.3
IORQ#: P3.4(IORQ#) U10.2
IORQ_3V3#: U9.100 U10.18
IRQ: J3.5 Q8.1 R57.1 U9.60
ISET: R47.1 U1.22
LA2: P1.05 P5.05 U3.9
LA3: P1.06 P5.06 U3.8
LA4: P2.05 U3.7
LA5: P2.06 U3.6
LA6: P2.07 U3.5
LA7: P2.08 U3.4
LA8: P2.10 U3.3
LA9: P2.11 U3.2
LA10: P2.12 U2.7
LA11: P2.13 U2.6
LA12: P2.14 U2.5
LA13: P2.15 U2.4
LINK#: CON2.A11 U1.2
MCU_IRQ#: J3.7 U7.35 U9.10
MCU_RESET#: J1.10 U7.39 U9.12
MDI_RX+: T1.8 U1.16
MDI_RX-: T1.6 U1.17
MS1#: P4.4 U10.3
MS1_3V3#: U9.3 U10.17
NC1: T1.4
NC2: T1.5
NC3: T1.13
NC4: T1.12
OE_ADDR#: R61.2 U2.19 U3.19 U9.57
OE_DATAIN#: J3.6 R62.2 U4.19 U9.53
OE_DATAOUT#: J3.4 R63.2 U5.19 U9.52
P1LED1: Q5.1 R45.1 U1.1
PCK0: R53.1 U7.34
PCK1: R52.1 U7.9
PFIQ#: P4.3 Q9.3
PIRQ#: P2.16 Q8.3
PRE#: P2.03 U2.8
PRNW: P2.04 P5.02(WBE#) U10.5
PRST#: P1.15 P5.15 U2.9
PS1#: P1.03 U2.2
PWE#: P1.02 U2.3
RE#: J3.1 U2.12 U9.99 U11.24
REF8M: P4.2 U10.4
REF8M_3V3: U9.89 U10.16
RI: P7.9 U15.8
RNW: U9.90 U10.15
RST#: U2.11 U9.18
RTS: P7.7 U15.10
RX: P7.2 U15.4
RXN: CON2.A3 T1.11
RXP: CON2.A6 T1.9
SDIO_CLK: U6.M6 U6.M8 U6.N8 U6.P8 U7.41
SDIO_CMD: U6.L12 U6.L13 U6.L14 U6.M5 U7.38
SDIO_DAT0: U6.A3 U7.42
SDIO_DAT1: U6.A4 U7.52
SDIO_DAT2: U6.A5 U7.26
SDIO_DAT3: U6.A2 U6.B2 U7.37
SERIAL_CTS: U9.64 U15.18
SERIAL_DCD: U9.54 U15.16
SERIAL_DSR: U9.2 U15.17
SERIAL_DTR: U9.1 U15.12
SERIAL_INVALID#: U9.33 U15.21
SERIAL_RI: U9.56 U15.15
SERIAL_RTS: U9.59 U15.13
SERIAL_RXD: U7.5 U9.37 U15.19
SERIAL_TXD: U7.6 U9.26 U15.14
TX: P7.3 U15.9
TXN: CON2.A2(TX-) T1.16
TXP: CON2.A1 T1.14(TX-)
VPP_FAST: U9.76(VPP_FAST)
WE#: J3.3 U2.17 U9.80 U11.31
XIN: C93.1 U7.62 Y3.2
XOUT: C94.1 U7.61 Y3.1
N10979: CON3.1 P6.1
N11019: CON3.4 P6.2
N11038: CON3.3 P6.5
N11056: CON3.5 P6.4
N11074: CON3.2 P6.3(GND)
N16774588: T1.3 U1.19
N16774596: T1.1 U1.20
N16774746: C17.1 T1.7
N16774754: R6.1 T1.10
N16774758: C19.1 R6.2 R8.2 R9.2 R10.2
N16774816: CON2.A4 CON2.A5 R9.1
N16774874: CON2.A7 CON2.A8 R10.1
N16774894: C18.1 T1.2
N16774902: R8.1 T1.15
N16775004: CON2.A10 R11.2
N16775008: CON2.A12 R12.2
N16795561: L2.1 U8.3
N16795607: R42.2 R43.1 U8.5
N16795916: C21.1 U1.24 Y2.1
N16795928: C20.1 U1.25 Y2.2
N16827776: Q5.3 Q6.1 R46.2
N16834816: C82.2 R50.2 R51.1 U14.4
N16838237: P3.1
N16838239: P3.2
N16839671: R13.2 U5.2
N16839674: R14.2 U5.3
N16839677: R15.2 U5.4
N16839680: R16.2 U5.5
N16839683: R17.2 U5.6
N16839686: R18.2 U5.7
N16839689: R19.2 U5.8
N16839692: R20.2 U5.9
N16848740: C88.1 U15.1
N16848746: C88.2 U15.2
N16848775: C90.2 U15.24
N16848795: C90.1 U15.28
N16848912: C89.1 U15.3
N16848919: C91.1 U15.27
N16856391: J1.2 U7.51
N16856394: J1.4 U7.53
N16865686: R55.2 U12.7
N16865689: R54.1 U12.3(\W\P / IO2)

Pads without a net: D1 2; J1 6 7 8; U1 3 9 10 15 30 31 32 33 34 35 36 39; U2 1; U3 1; U4 1; U6 A1 A7 A9 A10 A11 A12 A13 A14 B1 B3 B4 B5 B6 B7 B9 B10 B11 B12 B13 B14 C3 C5 C9 C10 C11 C12 C13 C14 D1 D2 D3 D12 D13 D14 E1 E2 E3 E5 E8 E9 E10 E12 E13 E14 F1 F2 F3 F10 F12 F13 F14 G1 G2 G3 G10 G12 G13 G14 H1 H2 H3 H5 H12 H13 H14 J1 J2 J3 K6 K7 K10 K12 K13 K14 L1 L2 L3 M1 M2 M3 M7 M9 M10 M11 M12 M13 M14 N1 N7 N9 N10 N11 N12 N13 N14 P1 P7 P9 P10 P11 P12 P13 P14; U7 3 4 10 15 16 19 20 23 25 31 32 33 36 40 43 44 47 48 49 50 55 56 57 59 63; U9 62; U10 1 6 7 8 9 11 12 13 14; U11 1 30; U13 4; U15 20

## Via types
v1: diameter 0.61, hole 0.33, TOP to BOTTOM, 510 vias

## Routing (per net, layer and track width the routed paths; a pad name or vN(x,y) marks a point on that pad's centre or on a via; arc(x,y) is an arc through that point)
GND: length 463.7
  TOP w0.127: C104.2 22.27,33.8 ; C104.2 21.42,33.8 ; C104.2 21.84,33.31 ; 9.85,57.22 9.78,57.29 v1(9.78,58.42) ; 9.85,57.22 U6.H10 ; 9.85,57.22 v1(10.35,57.72) ; 140.71,36.2 C44.2 140.71,37.46 ; P7.11 144.97,9.53 ; P7.11 142.29,12.2 ; P7.11 142.29,6.85 ; P7.11 139.61,9.53 ; 122.28,38.59 R51.2 121.43,38.59 ; Q9.2 79.41,55.67 ; Q9.2 78.25,55.67 ; Q9.2 78.83,55.05 ; Q9.2 78.83,56.31 80.14,57.63 v1(80.42,57.63) ; 40.65,26.04 C59.2 41.1,25.61 ; J2.10 38.67,30.87 ; J2.10 39.7,29.84 ; J2.10 38.67,28.82 ; 21.62,63.5 P2.01 ; P2.01 22.48,62.64 ; P2.01 23.34,63.5 ; P2.01 22.48,64.36 ; 11.32,49.9 C68.2 11.77,50.32 ; J1.9 4.89,20.07 ; J1.9 4.89,18.98 ; J1.9 3.31,19.53 ; J1.9 6.47,19.53 ; P4.1 72.87,63.5 ; P4.1 72.01,62.64 ; P4.1 72.01,64.36 ; P4.1 71.15,63.5 ; 51.26,20.11 C57.2 51.69,20.56 ; 92.86,19.26 C53.2 92.86,20.11 ; 3.31,22.07 J1.5 ; J1.5 6.47,22.07 ; J1.5 4.89,21.52 ; J1.5 4.89,22.61 ; 109.86,42.76 U5.1 ; U5.1 109.86,44.81 110.3,45.24 v1(110.59,45.24) ; U5.1 110.22,43.78 ; v1(71.22,54.93) 71.53,54.61 U10.19 ; 67.39,25.19 C86.2 67.39,24.34 ; 45.18,42.68 C80.2 ; C80.2 44.75,43.17 ; C80.2 45.61,43.17 ; 63.12,62.64 P2.17 ; P2.17 62.26,63.5 ; P2.17 63.98,63.5 ; P2.17 63.12,64.36 ; 39.2,23.35 C17.2 40.05,23.35 ; 47.99,34.4 C51.2 47.13,34.4 ; 21.85,37.83 C96.2 21.85,38.69 ; 17.78,34.35 U7.17 18.63,34.04 ; U6.C4 U6.D4 10.54,59.85 10.54,59.85 ; 14.02,28.79 C72.2 13.16,28.79 ; J1.3 4.89,23.88 ; J1.3 6.47,23.34 ; J1.3 4.89,22.79 ; J1.3 3.31,23.34 ; 127.74,37.04 C83.2 127.74,37.89 ; 118.58,46.31 Q10.2 ; Q10.2 119.16,46.94 ; Q10.2 119.73,46.31 ; Q10.2 119.16,45.67 v1(120.21,44.61) ; R59.2 114.66,43.93 ; R59.2 114.66,43.07 ; R59.2 115.11,43.5 ; 42.8,62.64 P2.09 ; P2.09 43.66,63.5 ; P2.09 42.8,64.36 ; P2.09 41.94,63.5 ; 52.22,32.7 U1.37 52.22,31 ; 112.12,37.89 C105.2 111.27,37.89 ; R48.2 24.1,43.82 v1(24.7,44.42) ; R48.2 23.6,43.39 ; R48.2 23.6,44.25 ; 83.05,38.1 C100.2 82.59,37.67 ; 52.81,21.86 R47.2 52.81,21 ; U6.A6 14.43,58.85 v1(14.54,58.74) ; J3.10 55.5,57.54 ; J3.10 56.53,56.52 ; J3.10 54.47,56.52 ; v1(61.79,52.39) 60.89,53.29 Q8.2 ; 50.63,42.53 C79.2 51.48,42.53 ; 143.31,40.66 U8.2 ; U8.2 144.22,40.66 ; U8.2 143.76,41.49 ; 104.01,42.76 U5.10 103.65,43.78 ; R60.2 117.84,42.66 ; R60.2 118.29,42.23 ; R60.2 117.84,41.8 ; 66.45,57.18 U10.10 ; U10.10 66.45,59.08 ; U10.10 65.02,58.13 64.73,58.42 v1(64.23,58.42) ; 146.94,62.64 P1.16 ; P1.16 147.8,63.5 ; P1.16 146.94,64.36 ; P1.16 146.08,63.5 ; 31.37,40.54 Q5.2 ; Q5.2 31.37,42.07 v1(30.89,42.55) 32.01,43.67 R45.2 ; Q5.2 31.95,41.16 ; Q5.2 30.79,41.16 ; 134.39,10.95 P7.5 ; P7.5 136.27,10.95 ; P7.5 135.33,11.89 ; P7.5 135.33,10 ; 60.37,51.48 R57.2 ; R57.2 60.82,51.91 ; R57.2 60.37,52.34 ; 21.77,57.33 U3.10 22.16,56.38 ; 34.34,28.74 C103.2 33.48,28.74 ; U6.G5 v1(10.35,57.72) ; v1(10.35,57.72) 10.98,58.35 U6.E7 ; v1(140.91,33.18) 140.43,33.66 C89.2 ; 18.3,58.21 C65.2 18.3,57.36 ; 56.93,35.53 C84.2 57.36,36.03 ; 6.4,32.85 C97.2 5.54,32.85 ; 76.54,25.88 C50.2 76.09,25.45 ; 2.59,57.68 C66.2 1.73,57.68 ; 28.67,31.3 U12.4 ; U12.4 29.12,32.23 ; U12.4 28.22,32.23 ; 75.67,22.75 R49.2 ; R49.2 75.67,23.61 ; R49.2 76.45,23.18 v1(76.77,22.86) ; 55.55,28.05 C101.2 56.4,28.05 ; 100.16,43.6 C106.2 101.01,43.6 ; C20.2 62.02,24.75 v1(62.48,24.29) ; C20.2 62.51,25.4 ; C20.2 62.02,25.83 ; 40.95,53.39 C108.2 40.95,54.24 ; C89.2 139.59,33.23 ; C89.2 139.59,34.08 ; 141.97,26.78 C92.2 141.54,27.23 ; 75.23,57.57 R58.2 ; R58.2 75.66,58.03 ; R58.2 76.09,57.57 ; 141.43,44.62 R43.2 ; R43.2 v1(141.86,46.04) ; R43.2 142.29,44.62 ; C21.2 v1(62.02,22.69) ; C21.2 62.51,21.59 ; C21.2 62.02,21.16 ; P7.10 117.3,12.2 ; P7.10 119.98,9.53 ; P7.10 114.62,9.53 ; P7.10 117.3,6.85 ; U6.J5 9.35,58.99 9.43,58.9 9.43,58.77 v1(9.78,58.42) ; Q6.2 28.14,41.16 ; Q6.2 27.56,41.79 ; Q6.2 27.56,40.54 ; Q6.2 v1(25.77,41.16) ; 92.01,47.41 U4.10 92.01,49.32 ; 1.73,61.38 C67.2 2.59,61.38 ; 15.45,28.88 C95.2 14.59,28.88 ; C81.2 124.23,45.2 ; C81.2 124.23,44.34 ; C81.2 123.74,44.77 ; C94.2 3.1,35.73 v1(3.59,35.24) ; 9.35,45.93 C69.2 9.35,46.78 ; v1(9.78,58.42) 9.21,57.85 U6.K8 ; 79.31,44.42 C85.2 78.88,44.92 ; Q11.2 114.71,46.94 ; Q11.2 115.29,46.31 ; Q11.2 114.71,45.56 v1(115.82,44.45) ; Q11.2 114.13,46.31 ; 143.36,44.45 C43.2 143.82,44.02 ; Q8.2 60.32,53.93 ; Q8.2 61.47,53.93 ; 46.45,20.08 C63.2 46.88,20.53 ; 17.59,25.53 C19.2 19.75,25.53 ; 137.17,22.07 C91.2 ; C91.2 137.62,21.64 ; C91.2 137.62,22.98 137.47,23.14 U15.25 ; 5.81,59.85 v1(5.65,59.69) ; 30.84,55.03 C109.2 29.99,55.03 ; 83.21,55.72 84.07,55.72 ; 84.07,55.72 84.07,56.58 ; 84.07,55.72 84.94,55.72 ; U11.16 97.07,35.78 ; U11.16 96.46,36.67 ; U11.16 95.85,35.78 ; U6.P2 U6.N2 ; C93.2 4.55,27.26 ; C93.2 4.55,26.4 ; C93.2 5.65,26.83 v1(5.81,26.67) ; 129.15,13.72 129.73,13.72 ; 32.56,57.33 U2.10 32.96,56.38 ; 13.7,65.29 C64.2 13.7,66.15 ; 43.6,5.6 C18.2 43.6,6.46 ; 65.97,48.05 C3.2 65.97,47.2 ; C107.2 75.24,53.76 ; C107.2 74.55,54.22 ; C107.2 74.12,53.76 ; 46.72,24.24 U1.13 46.72,22.55 ; 53.2,33.66 C99.2 52.75,34.08 ; U6.P6 U6.N6 U6.N5 ; 54.02,19.79 C58.2 53.17,19.79
  TOP w0.191: v1(65.66,30.48) 66,30.48 66.47,30.01 U9.32 66.47,26.76 66.72,26.51 C48.2 66.72,25.03 66.45,24.77 ; U1.26 52.67,25.37 52.54,25.24 v1(52.17,25.24) 52.17,25.77 52.35,25.95 52.38,25.95 52.8,26.37 U1.28 ; U6.G5 10.35,59.66 10.54,59.85 ; v1(64.07,40.01) 64.44,40.38 64.44,40.99 64.71,41.25 64.71,41.91 64.47,42.15 U9.98 ; C102.2 v1(82.96,32.54) ; C18.2 v1(44.7,6.03) ; C100.2 82.59,39.1 v1(82.49,39.21) ; C97.2 5.97,32.32 v1(6.53,31.75) ; U9.5 59.12,40.19 58.67,40.64 58.3,40.64 58.19,40.75 C47.2 v1(56.19,40.75) ; U9.17 59.45,34.2 59.15,34.5 C46.2 58.41,34.5 v1(57.72,33.81) ; U9.39 69.97,26.96 70.58,26.35 70.58,25.92 70.53,25.87 C49.2 70.55,25.4 v1(71.22,24.74) ; C71.2 v1(12,28.57) ; v1(53.59,33.02) 52.91,33.02 52.75,33.18 C99.2 ; U6.P2 6.24,60.85 ; v1(55.5,28.89) 55.63,28.89 55.98,28.55 C101.2 ; C95.2 v1(15.02,27.94) ; C96.2 v1(22.8,38.26) ; U9.84 71.47,41.37 v1(71.06,40.96) ; U15.25 137.47,25.29 v1(138.84,26.67) 139.37,26.67 139.48,26.78 C92.2 ; U6.P4 5.81,59.85 ; C53.2 v1(91.06,19.68) ; U7.2 v1(9.7,31.04) ; C105.2 111.7,38.58 v1(112.01,38.89) ; C98.2 v1(2.79,39.05) ; C72.2 v1(13.59,27.94) ; U9.23 60.65,31.2 60.1,30.65 60.1,30.46 59.7,30.06 C45.2 58.09,30.06 v1(57.56,29.53) ; U6.P6 6.45,58.85 6.13,58.53 6.13,58.34 5.94,58.15 4.75,58.15 v1(4.38,57.78)
  TOP w0.254: C51.2 47.56,35.32 47.72,35.48 v1(47.72,36.04) ; v1(76.45,26.99) 76.45,26.75 76.09,26.38 C50.2 ; C44.2 140.27,36.83 v1(139.64,37.47) ; C59.2 C60.2 41.1,27.99 v1(41.21,28.1) ; U1.7 43.05,27.37 v1(42.48,27.94) ; R51.2 v1(121.86,39.85) ; v1(64.39,47.94) 64.71,47.62 65.78,47.62 ; v1(32.64,29.37) 33.35,29.37 33.91,28.81 C103.2 ; v1(45.02,19.68) 44.89,19.68 44.07,20.51 C62.2 C61.2 C63.2 ; C85.2 80.09,44.92 v1(80.9,45.72) ; C57.2 C55.2 53.28,20.11 C58.2 53.59,20.64 v1(53.75,20.8) 53.75,21.06 53.38,21.43 R47.2 ; v1(124.04,46.55) 124.04,44.7 124.4,44.34 U14.2 ; 45.22,43.18 45.02,42.98 45.02,42.35 44.86,42.19 v1(44.86,41.75) ; 45.22,43.18 U13.2 ; 45.22,43.18 45.19,43.18 C80.2 ; C87.2 v1(81.85,35.56) ; U12.4 28.67,33.23 29.25,33.81 v1(29.62,33.81) ; U9.70 v1(74.72,39.7) ; C106.2 100.58,44.45 v1(100.43,44.61) ; v1(2.79,36.83) 3.22,36.41 C52.2 4.57,36.41 4.62,36.35 U7.60 ; U1.18 49.22,24.32 49.66,24.77 v1(50.26,24.77) ; v1(66.14,24.45) 66.45,24.77 C86.2 ; C64.2 v1(14.86,65.72) ; U2.10 32.96,57.89 32.27,58.58 v1(32,58.58) ; U11.16 v1(96.46,33.97) ; 40.89,54.72 40.89,54.72 ; 127.93,37.47 128.84,37.47 v1(129.32,37.94) ; U3.10 v1(22.16,59.21) ; U9.84 v1(71.47,47.08) ; 6.24,60.85 v1(5.81,61.28) ; v1(55.66,35.26) 56.42,36.03 C84.2 ; C108.2 39.83,53.82 39.78,53.87 v1(39.52,53.87) ; v1(74.71,32.38) 74.9,32.2 U9.55 ; v1(103.32,45.56) 104.01,44.87 U5.10 ; U1.37 53.06,31.85 v1(53.44,32.23) ; v1(72.96,30.64) 73.38,30.64 73.97,30.05 U9.47 ; U4.10 v1(90.95,48.37) ; C67.2 v1(2.16,62.39) ; v1(19.46,56.99) 19.46,57.53 19.21,57.78 C65.2 ; v1(50.26,40.96) 50.26,41.52 50.31,41.57 50.31,41.84 50.98,42.51 51.05,42.51 ; v1(8.03,46.99) 8.67,46.35 C69.2 9.3,46.3 9.3,45.56 9.78,45.09 9.94,45.09 10.2,44.82 U7.46 ; v1(12.32,50.83) 11.57,50.83 11.32,50.58 C68.2 ; C66.2 v1(2.16,56.67) ; v1(45.34,23.65) 45.6,23.4 U1.13 ; v1(143.21,45.56) 143.82,44.95 C43.2 ; C19.2 v1(18.67,26.99) ; C17.2 v1(39.62,24.45) ; C104.2 22.01,33.97 22.4,33.97 22.96,33.42 v1(22.96,32.86) 22.82,32.86 21.84,33.84 21.84,33.87 21.34,33.87 21.29,33.81 20.42,33.81 19.88,34.35 U7.17 ; C109.2 v1(30.42,56.52)
  TOP w0.381: v1(143.45,38.89) 143.76,39.21 U8.2
  GROUND w0.127: P2.17 63.12,64.36 ; P2.17 62.26,63.5 ; P2.17 63.12,62.64 ; P2.17 63.98,63.5 ; 72.01,62.64 P4.1 ; P4.1 72.87,63.5 ; P4.1 72.01,64.36 ; P4.1 71.15,63.5 ; 54.47,56.52 J3.10 ; J3.10 55.5,57.54 ; J3.10 56.53,56.52 ; J3.10 55.5,55.49 ; 21.62,63.5 P2.01 ; P2.01 22.48,62.64 ; P2.01 23.34,63.5 ; P2.01 22.48,64.36 ; J2.10 39.7,29.84 ; J2.10 37.64,29.84 ; J2.10 38.67,30.87 ; J2.10 38.67,28.82 ; P7.5 135.33,11.89 ; P7.5 134.39,10.95 ; P7.5 135.33,10 ; P7.5 136.27,10.95 ; 139.61,9.53 P7.11 ; P7.11 142.29,12.2 ; P7.11 144.97,9.53 ; P7.11 142.29,6.85 ; P2.09 42.8,64.36 ; P2.09 43.66,63.5 ; P2.09 42.8,62.64 ; P2.09 41.94,63.5 ; 83.21,55.72 84.07,55.72 ; 84.07,55.72 84.07,56.58 ; 84.07,55.72 84.07,54.86 ; 84.07,55.72 84.94,55.72 ; 146.08,63.5 P1.16 ; P1.16 146.94,62.64 ; P1.16 146.94,64.36 ; P1.16 147.8,63.5 ; P7.10 119.98,9.53 ; P7.10 114.62,9.53 ; P7.10 117.3,12.2 ; P7.10 117.3,6.85
  BOTTOM w0.127: P7.11 144.97,9.53 ; P7.11 139.61,9.53 ; P7.11 142.29,12.2 ; P7.11 142.29,6.85 ; 55.5,55.49 J3.10 ; J3.10 56.53,56.52 ; J3.10 54.47,56.52 ; 84.07,54.86 84.07,55.72 ; 84.07,55.72 83.21,55.72 ; 84.07,55.72 84.07,56.58 ; 84.07,55.72 84.94,55.72 ; P7.10 119.98,9.53 ; P7.10 117.3,12.2 ; P7.10 117.3,6.85 ; P7.10 114.62,9.53 ; P2.09 43.66,63.5 ; P2.09 42.8,62.64 ; P2.09 41.94,63.5 ; P2.09 42.8,64.36 ; P2.17 63.12,64.36 ; P2.17 63.12,62.64 ; P2.17 63.98,63.5 ; P2.17 62.26,63.5 ; P4.1 72.87,63.5 ; P4.1 72.01,62.64 ; P4.1 71.15,63.5 ; P4.1 72.01,64.36 ; P7.5 135.33,11.89 ; P7.5 135.33,10 ; P7.5 136.27,10.95 ; P7.5 134.39,10.95 ; J2.10 38.67,30.87 ; J2.10 37.64,29.84 ; J2.10 38.67,28.82 ; P2.01 22.48,64.36 ; P2.01 22.48,62.64 ; P2.01 21.62,63.5 ; P2.01 23.34,63.5 ; 146.94,62.64 P1.16 ; P1.16 146.08,63.5 ; P1.16 146.94,64.36 ; P1.16 147.8,63.5 ; 71.56,4.45 71.69,4.57
  vias: v1(2,47.94) v1(2.16,15.88) v1(9.3,36.04) v1(9.78,41.12) v1(12.16,36.99) v1(16.76,37.15) v1(19.62,43.81) v1(25.34,54.61) v1(30.26,50.01) v1(37.72,65.09) v1(38.35,44.93) v1(40.58,14.29) v1(42.48,43.66) v1(43.12,32.38) v1(43.43,38.89) v1(46.93,38.58) v1(46.93,16.19) v1(47.09,40.8) v1(47.88,65.09) v1(48.83,9.53) v1(49.78,38.58) v1(51.85,39.37) v1(52.96,65.09) v1(54.86,23.5) v1(56.13,37.78) v1(56.77,39.21) v1(58.04,65.09) v1(58.67,15.56) v1(59.94,19.37) v1(61.21,24.13) v1(62.8,5.4) v1(63.12,13.34) v1(64.23,54.29) v1(68.2,15.24) v1(69.79,32.23) v1(70.1,16.83) v1(71.37,30.8) v1(72.64,9.53) v1(72.96,5.4) v1(73.28,54.93) v1(75.82,7.62) v1(76.45,11.43) v1(76.77,9.21) v1(77.72,13.65) v1(79.63,6.99) v1(81.22,47.62) v1(81.22,14.61) v1(82.49,53.02) v1(83.12,10.48) v1(86.93,36.51) v1(87.57,15.88) v1(88.2,59.37) v1(88.84,49.21) v1(90.42,43.18) v1(92.96,15.88) v1(99,33.97) v1(102.17,17.78) v1(103.12,48.9) v1(103.12,37.47) v1(103.12,29.53) v1(103.12,23.81) v1(103.76,64.45) v1(108.52,28.89) v1(108.52,24.77) v1(111.22,50.8) v1(111.38,35.56) v1(111.38,15.56) v1(111.7,31.11) v1(115.19,65.41) v1(115.82,50.96) v1(115.82,26.99) v1(116.14,33.02) v1(119.63,43.5) v1(119.63,40.01) v1(119.63,17.78) v1(120.27,26.99) v1(121.54,65.72) v1(122.49,30.48) v1(123.76,51.75) v1(127.89,43.81) v1(129.16,66.04) v1(129.16,55.56) v1(129.48,34.61) v1(133.29,56.83) v1(134.24,66.04) v1(138.05,56.83) v1(139.32,66.04) v1(143.45,56.83) v1(144.4,66.04) v1(145.35,33.34) v1(145.67,47.62) v1(147.89,35.24) v1(148.21,43.5) v1(149.48,66.04)
VCC1V2: length 35.5
  TOP w0.127: v1(52.48,45.09) 52.32,45.24 49.94,45.24 ; 50.63,43.51 C79.1 51.48,43.51 ; 49.13,43.65 U13.5 ; U13.5 49.13,44.61 ; U13.5 49.86,44.13 ; v1(49.63,45.09) 51.05,45.09 50.81,44.84 50.81,44.66 51.05,44.41 51.05,43.85
  TOP w0.254: v1(67.88,23.65) 68.37,24.14 C86.1 68.37,25.72 67.97,26.12 U9.35 ; v1(81.06,34.61) 80.74,34.92 79.95,34.92 79.78,35.09 C87.1 79.71,35.56 79.28,35.13 78.97,35.13 78.91,35.2 U9.61 ; U9.77 74.97,45.05 75.81,45.89 78.81,45.89 ; v1(55.18,37.47) 55.65,37 C84.1 57.43,37 57.63,37.19 59.5,37.19 59.5,37.2 60.07,37.2 60.07,37.19 U9.11 ; C85.1 78.81,45.89 ; 78.81,45.89 v1(76.91,43.99)
  BOTTOM w0.127: v1(52.48,45.09) 52.48,43.97 v1(52.64,43.81)
VCC1V8_ETH: length 10.4
  TOP w0.191: U1.8 46.41,26.87 v1(46.77,26.51) ; v1(51.69,26.35) 52.34,27.01 53.26,27.01 53.39,26.87 U1.29 ; 43.84,26.87 v1(43.84,26.44)
  TOP w0.254: U1.8 42.6,26.87 42.48,26.99 C60.1 C59.1 41.95,25.17 42.01,25.12 FB2.1
VCC3V3: length 176.3
  TOP w0.127: 141.82,37.47 141.22,38.08 R42.1 ; 141.82,37.47 142.03,37.27 142.03,36.83 ; 141.82,37.47 141.82,37.06 C44.1 ; 9.35,54.18 U6.J14 U6.J13 U6.J12 U6.J10 9.35,56.97 8.97,57.35 U6.K9 ; U6.F5 10.85,58.99 10.98,58.85 U6.E6 ; v1(43.59,44.13) 43.59,43.64 43.29,43.34 43.28,43.34 43.28,42.07 44.39,40.96 45.5,40.96 45.94,41.4 45.94,41.8 46.38,42.23 U13.3 ; C44.1 142.06,36.19 142.21,36.04 142.65,36.04 ; C44.1 142.61,36.83 ; 142.08,25.82 141.98,25.93 C92.1 ; v1(30.58,35.72) 31.86,34.44 R54.2 ; U15.22 135.52,22.73 135.35,22.56 v1(135.35,22.07) 136.17,22.88 U15.23 ; R55.1 32.33,26.68 U12.8 ; 145.67,36.25 L2.2 144.39,36.91 ; v1(42.32,37.47) 42.79,37 R56.1 ; R44.1 77.86,47.47 78.02,47.62 v1(79.47,47.62) 80.42,46.67 R61.1 ; U6.M4 U6.N4 U6.N3 U6.P3 3.77,60.35 ; U6.P5 6.27,59.35 5.65,58.74 ; R46.1 v1(26.45,42.87) ; R63.1 77.09,21.91 v1(77.57,22.38) ; v1(81.22,27.15) 81.06,27.3 80.71,27.3 80.58,27.43 80.58,28.26 80.9,28.57 R62.1
  TOP w0.191: U9.6 60.07,39.7 60.06,39.71 59.51,39.71 59.5,39.7 58.4,39.7 58.19,39.9 C47.1 55.82,39.9 55.71,40.01 v1(55.18,40.01) ; 93.92,20.37 93.71,20.16 C53.1 94.23,19.68 v1(94.55,19.37) ; v1(81.85,37.15) 81.85,37.99 C100.1 ; U9.67 81.95,38.19 ; v1(52.48,34.92) 51.9,34.34 C99.1 51.9,33.18 51.72,33 U1.38 ; v1(70.26,23.81) 69.68,24.4 C49.1 69.68,25.87 69.6,25.96 69.6,26.55 69.62,26.58 69.62,27.12 69.6,27.15 69.6,27.25 69.47,27.37 U9.38 ; U6.E6 U6.C6 U6.C7 U6.C8 U6.B8 U6.A8 17.38,57.85 C65.1 17.45,57.04 17.08,56.67 ; U9.22 60.37,31.69 59.63,30.96 59.2,30.96 59.15,30.9 C45.1 57.51,30.9 v1(57.4,30.8) ; U9.31 65.97,27.37 65.87,27.27 C48.1 65.87,25.24 65.71,25.08 v1(65.18,25.08) ; U9.14 59.49,35.69 59.15,35.35 C46.1 58.15,35.35 v1(57.72,34.92) ; 141.38,25.88 138.68,25.88 138.12,25.31 U15.26 ; v1(78.99,43.66) 78.23,42.89 78.23,42.5 ; U7.7 12.2,31.52 12,31.32 C71.1 ; 75.24,25.35 C50.1 ; U1.27 55.34,25.87 v1(55.66,26.19) 55.98,26.51 C101.1 ; 5.65,58.74 3.75,58.74 ; 142.08,25.82 v1(142.7,25.82) ; v1(82.65,33.66) 82.33,33.34 81.05,33.34 80.73,33.02 80.73,32.55
  TOP w0.254: U7.18 21.2,34.85 21.34,34.71 22.35,34.71 22.56,34.92 ; 78.23,42.5 77.92,42.19 U9.75 ; v1(2.79,59.19) 2.16,58.55 C66.1 3.54,58.53 3.75,58.74 ; U9.50 75.47,26.72 75.13,26.38 75.13,25.45 v1(75.82,24.77) ; 45.22,44.13 U13.1 ; 45.22,44.13 45.19,44.13 C80.1 ; 45.22,44.13 45.02,44.33 43.79,44.33 v1(43.59,44.13) ; v1(11.05,29.53) 11.05,30.11 11.53,30.59 C71.1 ; v1(9.94,47.62) 10.2,47.36 C69.1 10.23,46.35 10.66,45.92 10.66,45.42 10.7,45.38 U7.45 ; v1(47.4,30.16) 47.62,30.38 47.62,30.83 47.72,30.92 U1.46 47.72,32.86 47.56,33.02 C51.1 ; C103.1 33.91,27.2 33.75,27.05 v1(33.75,26.35) 33.28,26.83 U12.8 ; J1.1 v1(2.32,24.61) ; 67.13,46.92 66.88,46.67 v1(66.45,46.67) ; 67.13,46.92 67.13,47.44 C3.1 ; 67.13,46.92 67.47,46.58 U9.92 ; v1(56.45,20.95) 56.26,20.76 FB1.1 ; 3.77,60.35 3.56,60.57 2.19,60.57 C67.1 2.16,60.51 v1(1.52,59.88) ; U11.32 93.92,20.37 ; v1(2.95,38.1) 3.81,38.1 4.06,37.85 C52.1 4.57,37.25 4.66,37.35 U7.58 ; R11.1 23.42,18.9 v1(22.96,19.37) ; C104.1 21.99,34.92 22.56,34.92 ; 9.35,54.18 9.35,51.42 10.44,50.32 C68.1 10.47,49.8 v1(10.73,49.53) ; v1(23.27,34.92) 22.56,34.92 ; R12.1 v1(12.96,20.31) ; U9.58 79.59,33.69 80.73,32.55 C102.1 ; U9.88 v1(69.47,46.67)
  POWER w0.127: 38.67,38.98 J2.2 ; J2.2 39.7,40.01 ; J2.2 37.64,40.01 ; J2.2 38.67,41.03
  vias: v1(16.76,56.52) v1(143.29,36.35) v1(144.08,35.24)
VCC4_QS: length 134.3
  TOP w0.127: 30.21,53.98 36.77,53.98 38.2,55.4 39.15,55.4 39.47,55.09 41.93,55.09 ; 30.21,53.98 C109.1 ; 30.21,53.98 29.41,53.98 27.88,52.44 U3.20 ; 82.36,50.8 82.17,50.61 74.68,50.61 74.55,50.74 C107.1 72.81,52.92 72.58,52.68 U10.20 72.17,55.56 71.69,56.04 70.98,56.04 70.84,56.18 70.32,56.18 70.18,56.04 67.33,56.04 67.19,56.18 66.67,56.18 66.53,56.04 60.66,56.04 60.53,55.91 60.53,55.4 60.42,55.29 42.13,55.29 41.93,55.09 ; U2.20 38.67,52.44 39.08,52.85 41.52,52.85 41.93,53.27 41.93,53.68 C108.1 41.8,54.95 41.93,55.09
  TOP w0.191: 111.7,42.55 111.25,42.1 103.41,42.1 102.59,42.92 100.42,42.92 C106.1 100.43,42.76 100.27,42.92 U4.20 97.73,44.77 97.12,45.37 90.3,45.37 84.87,50.8 82.36,50.8
  TOP w0.254: R50.1 125.95,37.47 125.95,37.47 126.58,37.47 ; R50.1 124.88,37.97 125.35,38.44 U14.5 ; R50.1 C82.1 ; 126.58,37.47 C83.1 ; 126.58,37.47 126.58,34.09 126.14,33.66 121.95,33.66 121.7,33.91 121.7,35.88 115.03,42.55 111.7,42.55
VCC5V: length 36.6
  TOP w0.127: U14.1 125.35,42.04 125.22,41.91 123.73,41.91 123.45,42.19 U14.3 ; U8.1 142.81,41.91 143.13,42.23 144.62,42.23 144.71,42.32 U8.4 ; v1(112.97,37.31) 112.7,37.04 C105.1 ; U8.4 145.17,43.16 ; U8.4 144.71,43.99 ; 144.67,44.02 C43.1 ; C43.1 144.67,44.88 ; C43.1 145.12,44.45
  TOP w0.191: C105.1 111.22,37.04 111.01,36.83 110.05,36.83 109.86,37.02 U5.20
  TOP w0.254: U14.1 125.35,44.62 C81.1 125.39,44.96 125.39,45.48 v1(126.43,46.51)
  POWER w0.127: P4.5 82.17,64.36 ; P4.5 83.03,63.5 ; P4.5 81.31,63.5 ; P4.5 82.17,62.64 ; P1.17 149.48,64.36 ; P1.17 148.62,63.5 ; P1.17 149.48,62.64 ; P1.17 150.34,63.5 ; 80.67,55.72 81.53,55.72 ; 81.53,55.72 81.53,56.58 ; 81.53,55.72 82.4,55.72 ; 81.53,55.72 81.53,54.86 ; 24.16,63.5 P2.02 ; P2.02 25.88,63.5 ; P2.02 25.02,64.36 ; P2.02 25.02,62.64 ; 108.84,62.64 P1.01 ; P1.01 108.84,64.36 ; P1.01 107.98,63.5 ; P1.01 109.7,63.5
  vias: v1(145.03,45.4) v1(145.99,43.81) v1(146.15,45.4)
VDD1V8A_ETH: length 8.1
  TOP w0.254: FB2.2 42.01,22.19 42.6,21.59 42.64,21.59 42.85,21.38 C62.1 C61.1 C63.1 46.88,21.38 47.09,21.59 47.09,22.34 47.22,22.47 U1.14
VDD3V3A_ETH: length 8.6
  TOP w0.254: U1.21 50.72,20.66 50.74,20.64 50.74,19.71 51.18,19.26 C57.1 C55.1 52.96,18.94 C58.1 54.1,18.94 54.4,19.24 FB1.2
VDDCORE_SAM: length 17.2
  TOP w0.127: 14.02,29.63 C72.1 13.59,30.09
  TOP w0.191: 14.86,30.48 15.02,30.32 C95.1 14.66,29.86 14.52,29.71 ; 13.75,30.64 v1(14.22,30.16) ; 13.75,30.64 v1(13.49,30.64) 13.16,30.32 ; 13.75,30.64 14.03,30.64 14.7,31.31 U7.12 ; C96.1 20.82,38.26 ; 20.82,38.26 20.82,38.03 v1(20.26,37.47) ; 20.82,38.26 20.35,38.26 19.94,37.85 U7.24 ; 13.16,30.32 13.16,29.84 ; 13.16,30.32 12.7,30.78 U7.8 ; v1(5.97,34.77) C97.1 6.49,34.35 U7.64 ; C98.1 5.65,39.05 v1(5.81,39.21) 5.95,39.35 U7.54
VDDI: length 5.2
  TOP w0.127: C64.1 12.69,65.72 12.35,65.38 ; U6.C2 U6.C1
  TOP w0.191: U6.C1 12.35,65.38
A2: length 91.3
  TOP w0.127: v1(65.34,40.96) 65.34,41.45 64.99,41.8 64.99,42.38 64.97,42.4 U9.97 64.97,45.46 64.12,46.3 62.68,46.3 62.37,46.61 43.96,46.61 43.71,46.35 26.73,46.35 22.16,50.92 U3.11 ; U11.12 v1(97.73,32.38)
  BOTTOM w0.127: v1(97.73,32.38) 93.69,32.38 93.05,31.75 83.77,31.75 83.43,31.41 82.49,31.41 82.16,31.75 78.99,31.75 77.41,33.34 77.15,33.34 77.02,33.47 75.7,34.79 75.05,34.79 69.89,39.94 69.85,39.94 69.48,40.31 65.72,40.31 65.7,40.29 65.58,40.29 65.58,40.37 65.34,40.61 v1(65.34,40.96)
A3: length 91.1
  TOP w0.127: U11.11 v1(98.68,31.11) ; v1(65.98,39.69) 65.98,40.18 65.96,40.2 65.96,41.22 65.34,41.84 65.34,42.28 65.47,42.4 U9.96 65.47,45.47 64.39,46.55 64.26,46.55 64.25,46.56 62.78,46.56 62.48,46.86 43.86,46.86 43.6,46.61 27.11,46.61 22.8,50.92 U3.12
  BOTTOM w0.127: v1(65.98,39.69) 69.79,39.69 74.94,34.53 75.26,34.53 78.36,31.43 82.12,31.43 82.39,31.16 83.54,31.16 83.81,31.43 97.87,31.43 98.18,31.11 v1(98.68,31.11)
A4: length 94.2
  TOP w0.127: v1(65.34,38.42) 65.89,38.96 66.13,38.96 66.6,39.43 66.6,39.95 66.22,40.33 66.22,41.32 65.98,41.56 65.98,42.4 65.97,42.4 U9.95 65.97,45.33 64.5,46.8 64.36,46.8 64.35,46.81 63.92,46.81 63.87,46.86 62.84,46.86 62.59,47.12 43.75,47.12 43.5,46.86 27.49,46.86 23.43,50.92 U3.13 ; U11.10 v1(98.04,29.84)
  BOTTOM w0.127: v1(98.04,29.84) 88.2,29.84 86.93,31.11 83.85,31.11 83.64,30.91 82.28,30.91 82.07,31.11 78.63,31.11 78.57,31.18 78.25,31.18 75.15,34.28 74.54,34.28 69.76,39.05 65.48,39.05 65.34,38.91 v1(65.34,38.42)
A5: length 92.3
  TOP w0.127: v1(66.33,38.13) 66.68,38.48 66.68,39.15 66.85,39.32 66.85,40.05 66.6,40.3 66.6,42.27 66.47,42.4 U9.94 66.47,45.19 64.6,47.05 64.47,47.05 64.46,47.07 64.03,47.07 63.97,47.12 62.95,47.12 62.69,47.37 43.65,47.37 43.39,47.12 27.87,47.12 24.07,50.92 U3.14 ; U11.9 v1(98.68,28.57)
  BOTTOM w0.127: v1(66.33,38.13) 70.32,38.13 74.43,34.02 75.05,34.02 78.15,30.92 78.47,30.92 78.53,30.86 78.53,30.86 78.59,30.8 82.03,30.8 82.18,30.65 83.75,30.65 83.89,30.8 86.89,30.8 89.11,28.57 v1(98.68,28.57)
A6: length 94.3
  TOP w0.127: U3.15 24.7,50.92 28.25,47.37 43.29,47.37 43.54,47.62 62.8,47.62 63.05,47.37 64.08,47.37 64.13,47.32 64.56,47.32 64.57,47.31 64.71,47.31 66.97,45.05 U9.93 66.97,40.29 67.11,40.16 67.11,39.22 66.97,39.08 66.97,37.75 66.73,37.51 66.33,37.51 v1(65.98,37.16) ; v1(98.04,27.3) U11.8
  BOTTOM w0.127: v1(65.98,37.16) 66.23,37.16 66.86,37.78 70.31,37.78 74.33,33.77 74.94,33.77 78.04,30.67 78.17,30.67 78.36,30.48 81.99,30.48 82.07,30.4 83.85,30.4 83.94,30.48 86.61,30.48 89.47,27.62 97.73,27.62 v1(98.04,27.3)
A7: length 96.7
  TOP w0.127: U3.16 25.34,50.92 27.84,48.42 32.79,48.42 33.12,48.08 34.06,48.08 34.43,48.45 62.33,48.45 64.02,48.45 64.13,48.56 67.58,48.56 67.74,48.41 67.74,47.68 67.97,47.45 U9.91 67.97,42.4 67.25,41.68 67.25,40.38 67.36,40.26 67.36,36.77 67.27,36.67 v1(66.77,36.67) ; U11.7 v1(98.68,26.04)
  BOTTOM w0.127: v1(66.77,36.67) 67.25,37.15 70.59,37.15 74.22,33.52 74.84,33.52 75.84,32.52 75.84,32.45 78.13,30.16 81.95,30.16 81.97,30.14 83.96,30.14 83.98,30.16 86.57,30.16 89.49,27.24 94.85,27.24 96.05,26.04 v1(98.68,26.04)
A8: length 101.9
  TOP w0.127: v1(97.73,25.4) 98.36,24.77 U11.6 ; v1(66.61,35.24) 66.94,35.57 67.19,35.57 68.13,36.51 68.33,36.51 68.64,36.82 68.64,37.68 69.97,39 69.97,40.45 69.76,40.66 69.76,41.33 69.97,41.54 U9.87 69.97,46.29 70.09,46.41 70.09,46.93 69.97,47.05 69.97,47.25 70.09,47.37 70.09,47.88 69.97,48 69.97,48.58 69.73,48.82 64.03,48.82 63.91,48.7 62.22,48.7 34.32,48.7 33.96,48.34 33.23,48.34 32.89,48.67 28.22,48.67 25.97,50.92 U3.17
  BOTTOM w0.127: v1(97.73,25.4) 96.33,25.4 94.74,26.99 89.15,26.99 86.3,29.84 78.08,29.84 75.58,32.34 75.58,32.41 74.73,33.26 74.12,33.26 70.86,36.51 67.88,36.51 67.55,36.18 67.55,35.69 67.11,35.24 v1(66.61,35.24)
A9: length 102.2
  TOP w0.127: U3.18 26.61,50.92 28.6,48.93 33,48.93 33.33,48.59 33.85,48.59 34.22,48.96 60.85,48.96 62.12,48.96 62.18,49.02 63.87,49.02 63.92,49.07 69.83,49.07 69.88,49.02 70.02,49.02 70.22,48.82 70.22,48.11 70.35,47.99 70.35,47.26 70.23,47.15 70.35,47.04 70.35,46.9 70.47,46.77 U9.86 70.47,42.4 70.23,42.17 70.23,41.44 70.01,41.22 70.01,40.76 70.23,40.54 70.23,38.9 68.9,37.57 68.9,36.72 67.56,35.38 v1(67.56,34.77) ; 101.12,23.5 99.31,23.5 v1(99,23.81)
  BOTTOM w0.127: v1(99,23.81) 97.41,23.81 94.56,26.66 90.48,26.66 90.03,26.2 89.31,26.2 85.98,29.53 78.04,29.53 75.81,31.76 74.45,31.76 74.09,32.13 74.09,32.93 70.82,36.2 68.33,36.2 68.2,36.07 68.2,35.24 68.07,35.12 67.91,35.12 v1(67.56,34.77)
A10: length 82.4
  TOP w0.127: v1(69.15,35.24) 69.5,35.59 69.8,35.59 69.85,35.55 69.95,35.55 70.48,36.08 70.48,40.65 70.27,40.87 70.27,41.12 70.48,41.34 70.48,41.92 70.97,42.4 U9.85 70.97,46.63 70.6,47 70.6,47.14 70.59,47.15 70.6,47.16 70.6,48.09 70.48,48.22 70.48,48.92 70.12,49.28 69.99,49.28 69.94,49.33 63.81,49.33 63.76,49.28 62.08,49.28 62.01,49.21 60.96,49.21 60.96,49.21 34.86,49.21 34.23,49.85 U2.13 ; v1(90.74,26.04) U11.27
  BOTTOM w0.127: v1(90.74,26.04) 90.39,25.68 90.39,25.49 90.3,25.4 89.47,25.4 85.98,28.89 85.39,28.89 85.13,29.15 77.51,29.15 75.15,31.51 74.34,31.51 73.83,32.02 73.83,32.83 70.78,35.88 69.79,35.88 v1(69.15,35.24)
